# Altium PCB demo_dermis_main_testboard.PcbDoc (part 6 of 7)
Units mm, origin at the board's own origin, x right, y up, seen from the top; angles counter-clockwise.
Board outline 348.67 x 252.79 mm, 4 copper layers (Top Layer, Layer 1, Layer 2, Bottom Layer), stack 0.603 mm thick; 389 components, 231 nets, 2086 pads, 2626 vias.
Unrouted connection lines stored in the file: 34.
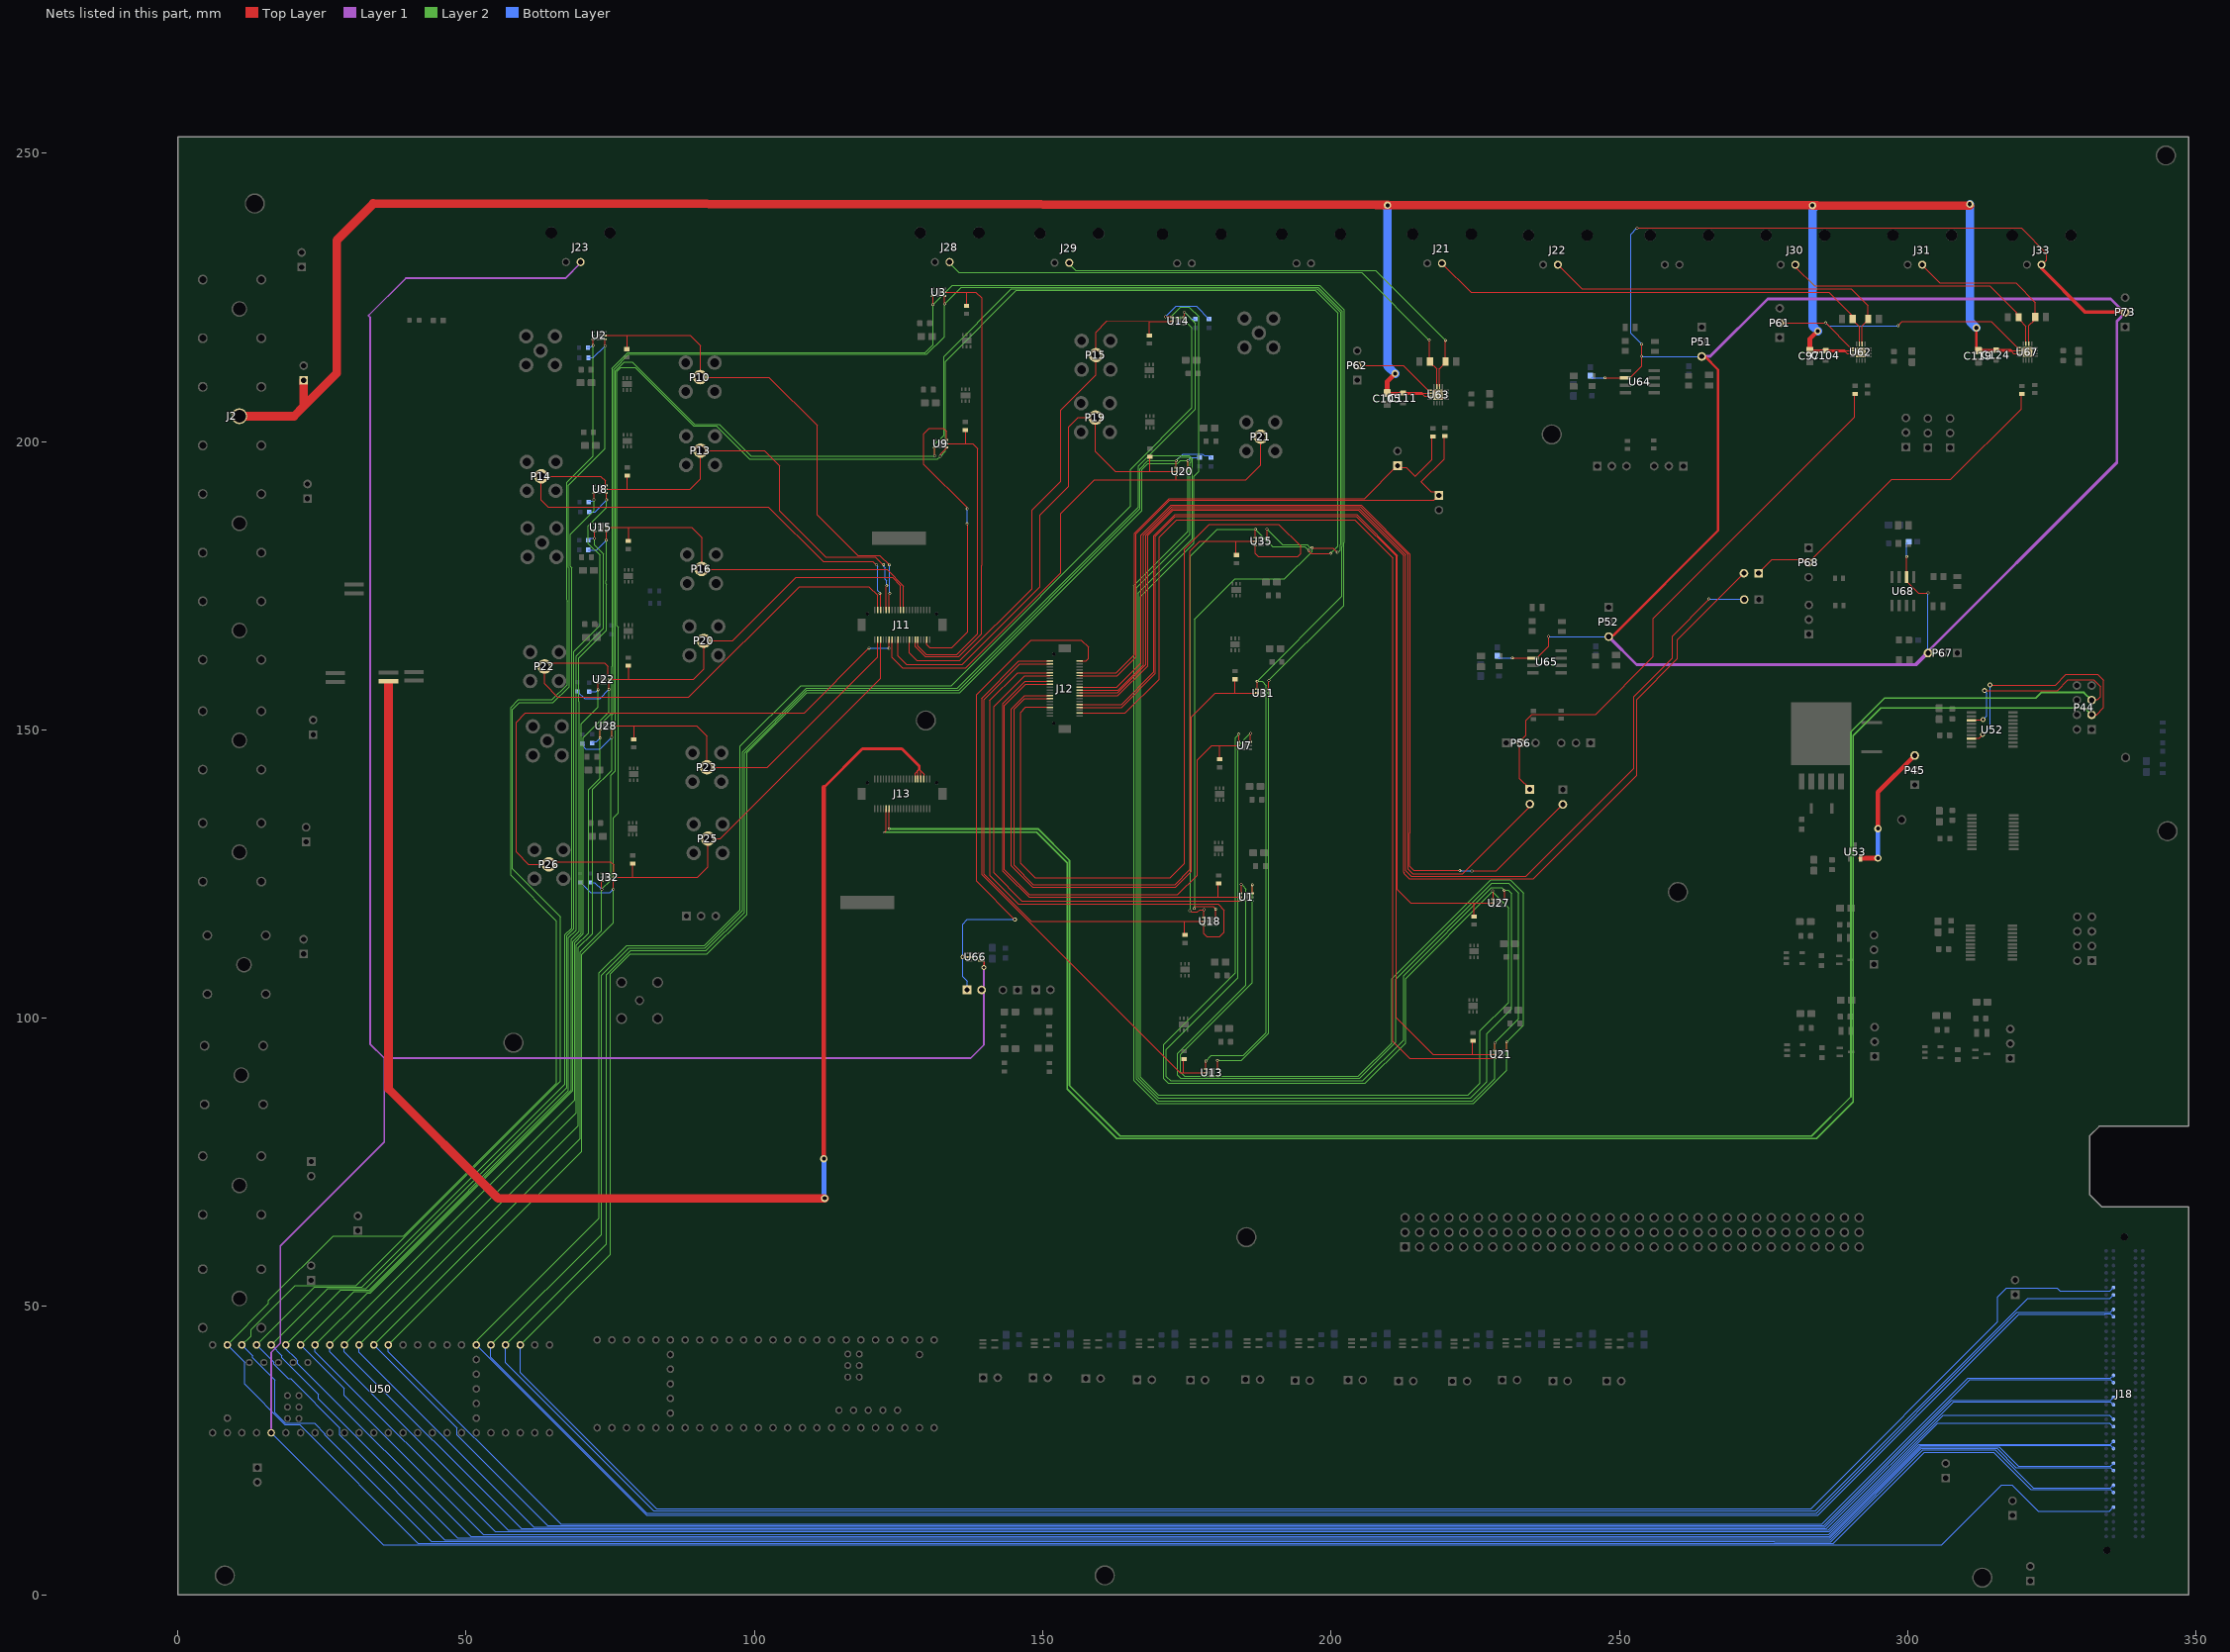
[diagram p7: the nets of this part, all layers, seen from the top]

## Via types
v1: diameter 0.4, hole 0.25, Top Layer to Bottom Layer, 1673 vias
v2: diameter 0.85, hole 0.5, Top Layer to Bottom Layer, 416 vias
v3: diameter 0.5, hole 0.3, Top Layer to Bottom Layer, 391 vias
v4: diameter 1.27, hole 0.711, Top Layer to Bottom Layer, 85 vias
v5: diameter 0.7, hole 0.4, Top Layer to Bottom Layer, 57 vias
v6: diameter 1.1, hole 0.7, Top Layer to Bottom Layer, 4 vias

## Nets (pads, with @x,y where several pads share a name; then routed paths per layer and width w, separated by ;. In a path a pad name is that pad's centre, name@x,y a point inside that pad or via, vN(x,y) a via of type N, cw(c..) or ccw(c..) an arc to the next point about the centre after c; other vN are vias at no path point) (continued)
VINP_X0: J11.28 P21.1 U20.3 | length 94.1
  Top Layer w0.15: J11.28@123.846,165.649 123.845,162.524 125.656,160.714 136.605,160.714 153.074,177.183 153.074,187.512 158.948,193.386 173.085,193.386 ; U20.3@173.094,194.174 173.085,194.165 173.085,193.386 ; P21.1@187.784,200.835 187.784,195.946 185.225,193.386 173.085,193.386
VINP_X0_0: P68.2 P70.1 R70.2 | length 60.2
  Top Layer w0.2: P70.1@274.118,177.192 276.466,179.541 P68.2@282.65,179.541 ; P68.2@282.778,179.004 297.188,193.413 307.453,193.413 319.672,205.633 319.672,208.209 319.787,208.323 R70.2@319.786,208.241
VINP_X0_2: J12.11 U1.3 | length 85.4
  Top Layer w0.15: J12.11@151.205,159.415 146.827,159.415 141.5,154.087 141.5,125.189 146.345,120.344 U1.3@184.077,120.344
VINP_X0_3: J12.38 U21.3 | length 187.6
  Top Layer w0.15: J12.38@156.865,152.937 164.297,152.937 170.15,158.791 170.15,183.402 173.197,186.448 204.099,186.448 210.733,179.814 210.733,95.939 213.605,93.067 U21.3@228.384,93.067
VINP_X1: J11.37 P22.1 U22.3 | length 86.1
  Top Layer w0.15: U22.3@74.849,159.38 74.696,159.38 74.594,159.483 74.594,161.006 74.014,161.586 64.213,161.586 P22.1@63.597,160.969 63.597,157.961 65.845,155.713 88.62,155.713 107.76,174.852 119.819,174.852 121.345,173.326 J11.37@121.346,170.799
VINP_Y0: J11.30 P26.1 U32.3 | length 113.7
  Top Layer w0.15: U32.3@75.593,125.093 75.593,126.559 75.058,127.095 64.755,127.095 P26.1@64.342,126.681 60.78,126.681 58.674,128.787 58.674,151.329 60.295,152.951 108.64,152.951 v3(119.855,164.165) ; v3(123.313,164.153) 123.313,165.617 J11.30@123.346,165.649
  Bottom Layer w0.15: v3(119.855,164.165) 119.861,164.159 123.307,164.159 v3(123.313,164.153)
VINP_Y0_0: P56.2 P58.1 R53.2 | length 99.7
  Top Layer w0.2: P58.1@234.388,139.856 232.696,141.547 232.696,148.039 233.744,149.087 233.744,151.628 234.828,152.712 245.852,152.712 255.842,162.702 255.842,169.33 290.777,204.264 290.777,208.15 R53.2@290.891,208.264
VINP_Y0_1: J11.4 U9.3 | length 52.6
  Top Layer w0.15: J11.4@129.846,165.649 129.857,165.638 129.857,164.774 130.347,164.284 134.191,164.284 136.955,167.048 v3@136.955,185.73 ; U9.3@133.308,200.268 133.308,201.734 132.772,202.27 130.292,202.27 129.383,201.361 129.383,196.036 v3@136.947,188.472
  Bottom Layer w0.15: v3@136.873,185.73 v3(136.873,188.33)
  other v3: 136.867,185.73
VINP_Y0_2: J12.9 U18.3 | length 95.2
  Top Layer w0.15: J12.9@151.205,159.914 145.643,159.914 140.768,155.04 140.768,124.783 145.763,119.788 180.363,119.788 181.428,118.723 181.428,114.923 180.663,114.157 178.457,114.157 177.921,114.693 U18.3@177.921,116.159
VINP_Y0_3: J12.33 U35.3 | length 151.4
  Top Layer w0.15: J12.33@151.491,153.931 147.043,153.931 146.147,153.035 146.147,126.885 148.649,124.383 172.079,124.383 174.472,126.776 174.472,181.218 178.896,185.642 190.904,185.642 194.716,181.829 194.716,180.551 194.216,180.051 187.334,180.051 186.819,180.566 U35.3@186.819,182.032
VINP_Y1: J11.35 P14.1 U8.3 | length 87.4
  Top Layer w0.15: U8.3@74.278,192.368 74.125,192.368 74.125,193.175 73.344,193.956 P14.1@63.025,193.956 63.025,189.813 63.038,189.813 63.968,188.883 64.173,188.679 102.436,188.679 111.885,179.231 120.528,179.231 v3@121.128,178.631 ; v3(121.723,173.691) 121.884,173.53 121.884,170.924 121.802,170.843 J11.35@121.846,170.799
  Bottom Layer w0.15: v3(121.125,178.627) 121.393,178.359 121.393,174.142 v3@121.784,173.752
VN_X0: J11.16 P15.1 R13.2 U14.2 | length 99.1
  Top Layer w0.15: J11.16@126.846,165.649 126.845,163.342 128.181,162.006 128.569,162.006 128.581,161.994 135.636,161.994 148.101,174.46 148.101,188.096 153.101,193.096 153.101,205.42 159.219,211.538 P15.1@159.219,214.965 ; P15.1@159.922,214.965 159.17,215.717 159.17,218.962 161.101,220.893 168.51,220.859 ; R13.2@168.453,218.391 168.51,218.447 168.51,220.859 ; 168.51,220.861 168.51,220.859 ; 168.612,220.841 U14.2@172.288,220.841 ; U14.2@172.612,220.841 172.449,220.841 168.51,220.859
VN_X0_2: J12.17 R9.2 U7.2 | length 105.2
  Top Layer w0.15: J12.17@151.252,157.912 147.029,157.912 143.312,154.195 143.312,125.759 147.659,121.411 173.404,121.411 176.808,124.815 176.808,144.81 179.266,147.269 180.641,147.269 ; R9.2@180.697,144.89 180.641,144.947 180.641,147.269 ; U7.2@183.958,147.269 180.641,147.269
VN_X0_3: J12.32 R19.2 U27.2 | length 163.4
  Top Layer w0.15: J12.32@156.355,154.414 163.665,154.414 169.273,160.022 169.273,183.69 172.898,187.315 204.439,187.315 211.512,180.241 211.512,122.266 213.784,119.994 224.741,119.994 ; R19.2@224.797,117.616 224.741,117.672 224.741,119.994 ; U27.2@228.058,119.994 224.741,119.994
VN_X1: J11.19 P16.1 R14.2 U15.2 | length 64.8
  Top Layer w0.15: U15.2@74.504,185.109 78.181,185.109 ; R14.2@78.125,182.73 78.181,182.787 78.181,185.109 ; P16.1@90.82,177.884 90.898,177.807 122.978,177.807 125.845,174.94 J11.19@125.845,170.799 ; P16.1@90.867,178.417 90.867,183.294 89.052,185.109 78.181,185.109
VN_Y0: J11.38 P23.1 R20.2 U28.2 | length 64.9
  Top Layer w0.15: U28.2@75.432,150.73 79.109,150.73 ; R20.2@79.052,148.351 79.109,148.408 79.109,150.73 ; P23.1@91.748,143.505 102.186,143.505 121.345,162.664 J11.38@121.346,165.649 ; P23.1@91.794,144.038 91.794,148.915 89.98,150.73 79.109,150.73
VN_Y0_1: J11.12 R8.2 U3.2 | length 82.9
  Top Layer w0.15: J11.12@127.846,165.649 127.845,164.408 129.572,162.681 135.4,162.681 139.365,166.647 139.365,178.549 139.365,224.917 138.378,225.905 136.823,225.905 ; U3.2@133.146,225.905 136.823,225.905 ; R8.2@137.136,223.271 136.88,223.526 R8.2@136.766,223.526 136.823,223.583 136.823,225.905
VN_Y0_2: J12.1 R12.2 U13.2 | length 100.4
  Top Layer w0.15: J12.1@151.205,161.914 145.843,161.914 139.389,155.461 139.389,124.937 170.451,93.874 173.804,90.522 174.406,90.522 ; R12.2@174.462,92.901 174.406,92.844 174.406,90.522 ; U13.2@178.082,90.522 174.406,90.522
VN_Y0_3: J12.25 R21.2 U31.2 | length 110.8
  Top Layer w0.15: J12.25@151.205,155.914 146.864,155.914 144.559,153.609 144.559,126.404 148.247,122.715 172.985,122.715 175.77,125.5 175.77,152.224 179.929,156.383 ; 179.929,156.395 183.304,156.395 ; R21.2@183.36,158.774 183.304,158.717 183.304,156.395 ; U31.2@186.98,156.395 183.304,156.395
VN_Y1: J11.29 P10.1 R7.2 U2.2 | length 87.7
  Top Layer w0.15: U2.2@74.255,218.387 77.932,218.387 ; R7.2@77.875,216.009 77.932,216.065 77.932,218.387 ; P10.1@90.572,211.162 102.494,211.162 110.867,202.789 110.867,187.297 117.912,180.251 121.739,180.251 v3(123.401,178.589) ; P10.1@90.618,211.695 90.618,216.572 88.803,218.387 77.932,218.387 ; J11.29@123.346,170.799 123.307,170.838 123.307,173.461 v3(123.473,173.627)
  Bottom Layer w0.15: v3(123.401,178.589) 123.443,178.548 123.443,173.657 v3(123.473,173.627)
VNEG: C97.2 C104.2 C105.2 C111.2 C119.2 C124.2 J2.1 P2.1 U62.14 U62.15 U62.17 U63.14 U63.15 U63.17 U67.14 U67.15 U67.17 | length 450.2
  Top Layer w0.2: C105.2@209.717,208.39 209.723,208.385 C105.2@209.754,208.353 ; U63.15@217.123,207.847 217.116,207.853 U63.15@217.109,207.853 216.183,207.853 215.683,208.353 U63.14@217.109,208.353 218.307,208.353 U63.17@218.557,208.103 ; C97.2@282.994,215.762 283,215.756 C97.2@283.031,215.725 ; U62.15@290.399,215.218 290.393,215.224 U62.15@290.386,215.224 289.46,215.224 288.959,215.725 U62.14@290.386,215.725 291.583,215.725 U62.17@291.834,215.474 ; U67.15@319.295,215.277 319.289,215.283 318.355,215.283 317.855,215.784 320.479,215.784 U67.17@320.729,215.533
  Top Layer w0.5: C105.2@209.724,208.387 209.723,208.385 209.71,208.353 C105.2@209.754,208.353 ; C105.2@210.039,208.353 215.683,208.353 ; C97.2@283.001,215.759 283,215.756 282.987,215.725 C97.2@283.031,215.725 ; C97.2@283.316,215.725 288.959,215.725 ; C119.2@311.882,215.784 v4(311.882,219.705) ; C119.2@312.793,215.784 317.855,215.784
  Top Layer w0.8: C105.2@209.717,208.39 209.717,210.403 v4(211.091,211.777) ; C97.2@282.994,215.762 282.994,217.775 v4(284.367,219.148)
  Top Layer w1.5: J2.1@10.67,204.398 20.125,204.398 21.918,206.192 ; P2.1@21.827,210.612 21.827,206.284 21.918,206.192 ; 33.631,240.96 27.571,234.9 27.571,211.844 21.918,206.192 ; 33.872,241.283 207.839,241.049 209.787,241.046 283.451,240.947 284.134,240.947 284.333,240.946 ; v4(283.451,240.914) v4@310.744,240.914
  Bottom Layer w1.5: v4@209.787,240.89 209.753,240.856 209.753,213.115 v4(211.091,211.777) ; 284.135,240.96 283.451,240.277 283.451,220.064 v4(284.367,219.148) ; v4(310.744,241.149) 310.744,220.843 v4(311.882,219.705)
  other v4: 209.787,240.959
VOCM_IN: C89.1 C90.1 C115.1 J33.2 P51.3 P52.3 P67.3 P73.2 U64.2@251.069,211.021 U65.2@234.952,162.437 U68.2@299.774,176.491 | length 452.2
  Top Layer w0.2: v3(231.389,162.458) 231.4,162.448 U65.2@234.792,162.448 ; U65.2@234.941,162.448 U65.2@234.952,162.437 235.663,162.437 237.708,164.482 v3@237.708,166.174 ; v3(247.506,211.042) 247.516,211.031 U64.2@250.909,211.031 ; U64.2@251.058,211.031 U64.2@251.069,211.021 251.78,211.021 253.824,213.066 v3(253.824,216.877) ; v3@253.141,236.996 319.646,236.996 324.077,232.565 324.077,231.421 J33.2@323.368,230.71 ; U68.2@299.784,176.501 U68.2@299.774,176.491 299.774,175.78 301.818,173.735 v3@303.51,173.735 ; U68.2@299.784,176.65 299.784,180.043 v3(299.795,180.053)
  Top Layer w0.4: P52.3@248.131,166.165 248.325,166.359 248.909,166.359 267.098,184.548 267.098,212.443 264.791,214.749 P51.3@264.248,214.749
  Top Layer w0.6: J33.2@323.185,230.003 330.774,222.414 P73.2@337.679,222.414
  Layer 1 w0.5: P52.3@248.131,166.165 252.984,161.312 301.197,161.312 ; P51.3@264.248,214.749 265.719,214.749 275.708,224.739 335.195,224.739 337.521,222.414 P73.2@337.679,222.414 337.679,222.308 336.252,220.881 336.252,196.367 301.197,161.312 ; P67.3@303.502,163.311 301.503,161.312 301.197,161.312
  Bottom Layer w0.2: C90.1@228.994,162.632 229.15,162.476 v3@231.389,162.476 ; v3(237.681,166.182) 237.69,166.174 248.123,166.174 P52.3@248.131,166.165 ; C89.1@245.111,211.215 245.267,211.06 v3@247.506,211.06 ; v3(253.031,236.996) 251.942,235.907 251.942,218.76 v3(253.824,216.877) ; v3(253.798,214.766) 253.807,214.758 264.24,214.758 P51.3@264.248,214.749 ; v3@299.812,180.053 299.812,182.293 C115.1@299.968,182.449 ; P67.3@303.502,163.311 303.51,163.32 303.51,173.753 v3(303.519,173.761)
VOCM_SEL: P61.2 U62.13 U67.13 | length 50.3
  Top Layer w0.2: P61.2@277.78,220.565 285.766,220.565 290.106,216.225 U62.13@290.386,216.225 ; v3(298.317,220.08) 299.04,220.804 314.481,220.804 319.002,216.284 U67.13@319.281,216.284
  Bottom Layer w0.2: v3(285.767,220.578) 286.263,220.08 v3(298.317,220.08)
VOCM_SEL2: P62.2 U63.13 | length 14.4
  Top Layer w0.2: P62.2@204.503,213.194 212.489,213.194 216.83,208.853 U63.13@217.109,208.853
VOUT_COMP: J12.2 P53.1 U66.2@137.236,110.617 | length 92.6
  Top Layer w0.15: v5@136.105,110.627 137.225,110.627 U66.2@137.236,110.617 ; P53.1@136.596,105.419 136.975,105.04 P53.1@137.271,104.744 ; v5@145.124,117.083 138.49,123.716 138.49,156.134 147.934,165.578 156.674,165.578 157.895,164.356 157.895,162.347 157.462,161.914 J12.2@156.355,161.914
  Bottom Layer w0.15: v5(136.081,110.623) 136.081,107.213 136.911,106.382 136.911,104.977 P53.1@136.837,104.903 ; v5@136.105,110.627 136.105,116.328 136.884,117.107 v5(145.149,117.107)
VOUT_COMP_EXT: J18.G36 J23.2 P53.2 U50.22 U66.4@139.318,109.967 | length 697.4
  Top Layer w0.25: v2(139.777,108.798) U66.4@139.777,109.967 ; P53.2@139.811,104.744 P53.2@139.811,104.903
  Layer 1 w0.3: U50.22@16.19,28.109 16.19,42.07 17.767,43.647 17.767,60.518 35.779,78.53 35.779,93.084 ; J23.2@69.913,231.044 67.18,228.311 39.527,228.311 33.105,221.888 33.105,221.806 33.332,221.578 33.332,95.53 35.779,93.084 ; v2(139.777,108.798) 139.777,95.357 137.504,93.084 35.779,93.084
  Bottom Layer w0.15: U50.22@16.19,28.109 35.594,8.705 305.891,8.705 316.278,19.092 318.046,19.092 322.609,14.529 334.931,14.529 335.666,15.264 J18.G36@335.666,15.206
VOUTN_OTA: J12.10 P63.1 R57.2 | length 93.7
  Top Layer w0.15: J12.10@156.355,159.914 162.727,159.914 165.871,163.058 165.871,184.124 171.88,190.133 205.828,190.133 P63.1@211.499,195.804
  Top Layer w0.2: P63.1@212.105,195.536 212.983,195.536 214.563,193.956 217.5,196.893 217.5,200.778 R57.2@217.614,200.893
VOUTN_OTA_INAMP: C107.2 J29.2 U63.10 | length 79.8
  Top Layer w0.2: U63.10@218.807,209.551 218.807,212.664 218.815,212.664 C107.2@219.83,213.679 ; C107.2@219.83,213.869 v3@219.83,217.543
  Layer 2 w0.1: J29.2@153.998,231.331 154.455,230.873 155.678,229.65 207.707,229.65 v3(219.815,217.543)
VOUTN_X0: J12.24 P71.2 | length 229.7
  Top Layer w0.15: J12.24@156.355,156.414 162.972,156.414 167.863,161.306 167.863,183.784 172.496,188.416 204.87,188.416 212.951,180.334 212.951,125.58 213.878,124.654 233.795,124.654 252.472,143.331 252.472,155.766 259.154,162.447 259.154,166.264 v3@265.559,172.669
  Bottom Layer w0.1: v3(265.523,172.696) 265.578,172.642 271.555,172.642 P71.2@271.61,172.587
VOUTN_X0_INAMP: C118.1 J30.2 U67.11 | length 47.2
  Top Layer w0.2: J30.2@280.483,230.272 283.779,226.977 314.196,226.977 318.82,222.352 318.82,221.929 C118.1@319.204,221.545 ; C118.1@319.314,221.133 320.479,219.968 U67.11@320.479,216.981
VOUTN_Y0: J12.20 P59.2 | length 172.7
  Top Layer w0.15: J12.20@156.355,157.414 162.78,157.414 167.007,161.641 167.007,183.728 172.253,188.974 205.175,188.974 213.641,180.508 213.641,132.067 213.641,126.296 214.312,125.626 v3@222.358,125.626 ; v3(224.373,125.527) 224.424,125.578 228.666,125.578 P59.2@240.167,137.08
  Bottom Layer w0.15: v3(222.305,125.578) v3@224.373,125.578
VOUTN_Y0_INAMP: C95.1 J21.2 U62.11 | length 80.6
  Top Layer w0.2: J21.2@219.207,231.369 219.207,230.901 224.219,225.889 286.32,225.889 290.419,221.79 C95.1@290.419,221.265 ; C95.1@290.419,221.074 291.583,219.909 U62.11@291.583,216.922
VOUTP_OTA: J12.12 P60.1 R58.2 | length 101.5
  Top Layer w0.1: 217.862,189.83 P60.1@218.681,190.648
  Top Layer w0.15: J12.12@156.355,159.415 162.923,159.415 166.136,162.628 166.136,183.997 171.969,189.83 217.862,189.83
  Top Layer w0.2: P60.1@218.681,190.648 218.031,191.298 217.281,191.298 215.605,192.974 219.597,196.965 219.597,200.851 R58.2@219.711,200.965
VOUTP_OTA_INAMP: C96.1 J28.2 U63.11 | length 97.7
  Top Layer w0.2: C96.1@217.01,213.898 v3@217.01,217.571 ; C96.1@217.142,213.703 218.307,212.538 U63.11@218.307,209.551 ; C96.1@217.142,213.893 C96.1@217.142,214.419
  Layer 2 w0.1: J28.2@133.818,231.115 133.818,230.916 135.424,229.31 205.254,229.31 v3(216.994,217.571)
VOUTP_X0: J12.26 P70.2 | length 232.2
  Top Layer w0.15: J12.26@156.355,155.914 163.016,155.914 168.214,161.112 168.214,183.732 172.612,188.13 204.727,188.13 212.617,180.24 212.617,125.296 212.701,125.211 212.701,125.006 213.501,124.206 235.069,124.206 252.998,142.135 252.998,155.283 260.074,162.359 260.074,165.659 P70.2@271.573,177.158
VOUTP_X0_INAMP: C122.2 J31.2 U67.10 | length 29.5
  Top Layer w0.2: J31.2@302.5,230.671 302.5,230.482 305.51,227.472 318.723,227.472 322.101,224.094 C122.2@322.101,221.575 ; U67.10@320.979,216.981 320.979,220.094 320.987,220.094 C122.2@322.002,221.109
VOUTP_Y0: J12.22 P58.2 | length 167.5
  Top Layer w0.15: J12.22@156.355,156.914 163.095,156.914 167.409,161.228 167.409,183.716 172.417,188.724 204.994,188.724 213.266,180.452 213.266,125.932 214.153,125.046 222.767,125.046 P58.2@234.366,136.644
VOUTP_Y0_INAMP: C102.2 J22.2 U62.10 | length 63.8
  Top Layer w0.2: J22.2@239.198,230.777 243.509,226.467 290.183,226.467 293.107,223.542 C102.2@293.107,221.241 ; U62.10@292.084,216.922 292.084,220.035 292.092,220.035 C102.2@293.107,221.05
VP_X0: J11.24 P19.1 R16.2 U20.2 | length 92.4
  Top Layer w0.15: J11.24@124.846,165.649 124.845,162.823 126.324,161.345 136.076,161.345 149.529,174.798 149.529,187.223 154.529,192.223 154.529,202.573 156.091,204.135 P19.1@159.129,204.135 159.129,198.241 162.546,194.824 U20.2@173.094,194.824 ; 168.543,194.841 R16.2@168.543,197.22
VP_X0_2: J12.15 R6.2 U1.2 | length 84.2
  Top Layer w0.15: J12.15@151.311,158.412 146.933,158.412 143.062,154.54 143.062,125.508 143.683,124.888 147.589,120.982 180.443,120.982 ; R6.2@180.5,123.36 180.443,123.304 180.443,120.982 ; U1.2@184.12,120.982 180.443,120.982
VP_X0_3: J12.34 R17.2 U21.2 | length 187.4
  Top Layer w0.15: J12.34@156.355,153.915 163.67,153.915 169.523,159.768 169.523,183.586 172.969,187.032 204.329,187.032 211.262,180.099 211.262,100.112 217.667,93.707 224.543,93.707 ; R17.2@224.6,96.086 224.543,96.029 224.543,93.707 ; U21.2@228.22,93.707 224.543,93.707
VP_X1: J11.21 P20.1 R18.2 U22.2 | length 67.9
  Top Layer w0.15: U22.2@74.849,158.73 78.166,158.73 ; R18.2@78.11,161.109 78.166,161.053 78.166,158.73 ; J11.21@125.346,170.799 125.345,175.016 123.938,176.423 107.216,176.423 96.216,165.423 P20.1@91.211,165.423 91.211,160.545 89.396,158.73 78.166,158.73
VP_Y0: J11.36 P25.1 R22.2 U32.2 | length 72.5
  Top Layer w0.15: U32.2@75.593,124.443 78.911,124.443 ; R22.2@78.855,126.821 78.911,126.765 78.911,124.443 ; J11.36@121.846,165.649 121.845,158.939 94.042,131.136 P25.1@91.956,131.136 91.956,126.258 90.141,124.443 78.911,124.443
VP_Y0_1: J11.10 R11.2 U9.2 | length 53.9
  Top Layer w0.15: J11.10@128.346,165.649 128.345,164.486 129.8,163.031 135.13,163.031 138.727,166.628 138.727,198.731 137.841,199.618 136.625,199.618 ; U9.2@133.308,199.618 136.625,199.618 ; R11.2@136.569,201.996 136.625,201.94 136.625,199.618
VP_Y0_2: J12.3 R15.2 U18.2 | length 88.1
  Top Layer w0.15: J12.3@151.205,161.415 145.979,161.415 139.842,155.278 139.842,124.921 147.954,116.809 174.603,116.809 ; R15.2@174.66,114.431 174.603,114.487 174.603,116.809 ; U18.2@177.921,116.809 174.603,116.809
VP_Y0_3: J12.27 R23.2 U35.2 | length 136.6
  Top Layer w0.15: J12.27@151.205,155.414 146.839,155.414 145.018,153.594 145.018,126.466 148.324,123.16 172.895,123.16 175.52,125.785 175.52,180.967 177.236,182.682 183.501,182.682 ; R23.2@183.558,180.304 183.501,180.36 183.501,182.682 ; U35.2@186.819,182.682 183.501,182.682
VP_Y1: J11.31 P13.1 R10.2 U8.2 | length 76.9
  Top Layer w0.15: U8.2@74.278,191.718 77.954,191.718 ; R10.2@77.897,194.096 77.954,194.04 77.954,191.718 ; v3@122.227,178.677 120.953,179.951 112.34,179.951 104.375,187.916 104.375,195.718 101.683,198.411 P13.1@90.64,198.411 90.64,193.533 88.825,191.718 77.954,191.718 ; J11.31@122.845,170.799 122.832,170.813 122.832,174.829 122.918,174.915 v3(122.918,175.01)
  Bottom Layer w0.15: v3(122.386,178.669) 122.386,178.377 122.622,178.14 122.622,176.124 122.841,175.905 122.918,175.828 v3(122.918,175.01)
VREF_2P5V: P45.3 U53.2 | length 23.5
  Top Layer w0.8: U53.2@291.788,127.755 v4(294.813,127.755) ; v4(294.813,132.87) 294.813,139.169 P45.3@301.195,145.55
  Bottom Layer w0.8: v4(294.813,127.755) v4(294.813,132.87)
VSS: J13.5 J13.7 J13.9 J13.11 R2.2 | length 253.4
  Top Layer w0.15: J13.5@129.345,141.48 J13.5@129.395,141.53
  Top Layer w0.2: J13.11@127.845,141.48 127.845,142.475 128.567,143.197 ; J13.9@128.345,141.48 128.345,142.895 128.499,143.048 ; 128.645,143.072 128.845,142.871 J13.7@128.845,141.48 ; 128.895,142.821 129.395,142.321 J13.5@129.395,141.53
  Top Layer w0.5: 112.028,140.026 118.714,146.713 125.549,146.713 128.567,143.695 128.567,143.197
  Top Layer w0.8: v4(112.028,75.636) 112.028,140.026 112.028,140.066
  Top Layer w1.5: 36.485,87.795 36.533,87.746 ; 36.533,157.875 36.533,87.746 ; v4(112.173,68.761) 55.518,68.761 36.533,87.746
  Bottom Layer w0.5: v4@111.993,75.602 v4(112.028,75.636)
  Bottom Layer w0.8: v4@112.045,68.592 v4@112.045,75.856
VTRIG_COMP: J13.30 P44.5 U52.3 | length 358.5
  Top Layer w0.15: U52.3@311.302,151.759 v2(313.03,151.759)
  Top Layer w0.2: J13.30@123.314,136.33 J13.30@123.345,136.33 ; v1(123.325,132.828) 123.335,132.838 123.335,136.158 J13.30@123.325,136.168 ; v2(313.304,156.802) 325.949,156.802 327.792,158.645 332.249,158.645 333.446,157.448 333.446,155.8 332.906,155.26 331.961,155.26 P44.5@331.856,155.155
  Layer 2 w0.3: v1(123.325,132.828) 149.154,132.828 154.625,127.357 154.625,88.33 163.408,79.547 283.274,79.547 290.119,86.391 290.119,149.657 295.963,155.502 322.154,155.502 323.139,156.486 330.524,156.486 P44.5@331.856,155.155
  Bottom Layer w0.15: v2(313.304,156.802) 313.716,156.39
  Bottom Layer w0.2: v2(313.03,151.759) 313.716,152.445 313.716,156.39
VTUNE_PSEUDO: J13.32 P44.3 U52.8 | length 366.4
  Top Layer w0.15: 122.822,132.495 J13.32@122.822,136.33
  Top Layer w0.2: v1(122.525,132.198) 122.822,132.495 ; J13.32@122.826,136.226 122.836,136.235 J13.32@122.845,136.33 ; U52.8@311.356,148.563 312.364,148.563 v2(312.985,149.183) ; v2(314.263,157.762) 325.574,157.762 327.406,159.593 332.925,159.593 333.96,158.559 333.96,153.841 332.734,152.615 P44.3@331.856,152.615
  Layer 2 w0.3: v1(122.525,132.198) 139.169,132.239 148.925,132.239 154.225,126.939 154.225,87.746 162.824,79.147 284.159,79.147 290.519,85.507 290.519,133.412 290.519,148.98 295.339,153.8 330.671,153.8 P44.3@331.856,152.615
  Bottom Layer w0.2: v2(312.985,149.183) 314.263,150.461 v2(314.263,157.762)
X0_CSN_SCL: J18.G09 R40.2 U7.6 U14.6 U27.6 U50.28 | length 932.1
  Top Layer w0.15: U14.6@174.506,221.55 174.547,221.59 v3(174.547,222.426) ; U7.6@186.013,147.989 v3(186.013,149.387) ; U7.6@186.016,147.919 U7.6@186.055,147.958 ; U27.6@230.113,120.714 v3@230.113,122.113 ; U27.6@230.116,120.644 U27.6@230.155,120.684
  Layer 2 w0.15: U50.28@54.29,43.349 73.45,62.509 73.45,107.478 78.182,112.21 91.451,112.21 97.953,118.711 97.953,146.141 108.997,157.185 135.135,157.185 166.616,188.665 166.616,195.734 168.432,197.551 ; v3(174.547,222.426) 176.496,220.476 176.496,205.615 168.432,197.551 ; v3(186.013,149.387) 183.803,147.178 183.803,107.001 171.395,94.593 171.395,89.863 172.126,89.132 205.485,89.132 212.544,96.191 212.544,107.397 227.753,122.606 229.598,122.606 v3(230,122.204) 230.683,122.204 231.311,121.576 231.311,101.616 226.984,97.288 226.984,89.02 224.161,86.197 169.995,86.197 166.526,89.666 166.526,173.697 175.934,183.105 175.934,196.998 175.382,197.551 168.432,197.551
  Bottom Layer w0.15: U50.28@54.29,43.349 54.29,41.24 81.325,14.205 284.162,14.205 318.958,49.001 335.17,49.001 J18.G09@335.666,49.496 ; v3(174.547,222.426) 175.744,221.228 R40.2@176.478,221.228
X0_CSN_SDA: J18.G10 R39.2 U7.1 U14.1 U27.1 U50.27 | length 963.3
  Top Layer w0.15: v3(171.262,221.652) 172.346,221.652 U14.1@172.449,221.55 ; U7.1@183.958,147.919 U7.1@184.033,147.994 ; U7.1@183.991,148.024 v3@183.991,149.387 ; U27.1@228.058,120.644 U27.1@228.133,120.719 ; U27.1@228.091,120.749 v3@228.091,122.113
  Layer 2 w0.15: U50.27@51.75,43.349 51.92,43.519 51.92,44.228 73.032,65.339 73.032,107.857 77.807,112.632 91.317,112.632 97.5,118.815 97.5,147.155 108.04,157.695 134.134,157.695 165.242,188.803 165.242,195.192 175.896,205.846 175.896,219.742 174.104,221.533 172.174,221.533 172.154,221.554 ; v3(171.262,221.652) 172.055,221.652 172.154,221.554 ; v3(183.983,149.264) 183.398,148.679 183.398,107.861 170.965,95.429 170.965,89.53 171.771,88.724 205.881,88.724 212.894,95.736 212.894,106.869 v3@227.97,121.945 ; v3(227.97,122.081) v3@227.97,121.945 ; 172.154,221.554 173.922,223.322 175.38,223.322 177.031,221.671 177.031,194.803 176.222,193.994 176.222,182.374 166.924,173.077 166.924,89.805 170.058,86.67 223.772,86.67 225.821,88.719 225.821,97.805 230.77,102.754 230.77,119.145 v3@227.97,121.945
  Bottom Layer w0.15: U50.27@51.75,43.349 81.278,13.82 284.382,13.82 319.257,48.696 334.165,48.696 334.19,48.721 335.171,48.721 J18.G10@335.666,48.226 ; v3(171.262,221.652) 171.319,221.652 173.108,223.441 176.605,223.441 178.807,221.238 R39.2@178.83,221.238
X0_CSP_SCL: J18.G06 R42.2 U1.6 U20.6 U21.6 U50.30 | length 875.8
  Top Layer w0.15: U20.6@175.151,195.474 175.177,195.5 175.159,195.517 v3(175.159,196.677) ; v3(186.333,123.144) 186.333,121.65 U1.6@186.341,121.642 ; v3(230.433,95.87) 230.433,94.376 U21.6@230.442,94.367
  Layer 2 w0.15: U50.30@59.37,43.349 75.042,59.021 75.042,107.737 78.409,111.103 91.779,111.103 98.693,118.017 98.693,146.032 109.091,156.43 135.606,156.43 167.225,188.05 167.225,195.164 168.216,196.155 173.334,196.155 173.857,196.677 v3(175.159,196.677) 175.159,184.442 165.724,175.007 165.724,89.294 169.784,85.234 224.714,85.234 230.433,90.954 v3(230.433,95.87) 233.389,98.826 233.389,121.665 231.012,124.041 227.703,124.041 210.513,106.851 210.513,95.732 204.691,89.91 174.544,89.91 173.852,90.603 173.852,93.702 186.314,106.164 v3@186.314,123.144
  Bottom Layer w0.15: U50.30@59.37,43.349 59.37,38.53 82.968,14.933 283.186,14.933 315.599,47.346 315.599,51.682 317.148,53.231 325.855,53.231 326.369,52.716 335.076,52.716 J18.G06@335.666,53.306 ; v3(175.159,196.677) 175.719,197.237 R42.2@177.175,197.237
X0_CSP_SDA: J18.G07 R41.2 U1.1 U20.1 U21.1 U50.29 | length 878.8
  Top Layer w0.15: U20.1@173.094,195.474 173.117,195.497 v3(173.117,196.68) ; U1.1@184.284,121.642 184.396,121.754 v3(184.396,123.188) ; U21.1@228.384,94.367 228.403,94.386 v3(228.403,95.747)
  Layer 2 w0.15: U50.29@56.83,43.349 74.334,60.852 74.334,107.54 78.512,111.719 91.598,111.719 98.253,118.373 98.253,146.016 109.121,156.885 135.401,156.885 166.866,188.35 166.866,195.285 168.26,196.68 v3(173.117,196.68) 173.152,196.68 173.773,197.301 175.278,197.301 175.684,196.895 175.684,196.46 175.488,196.264 175.488,183.899 166.136,174.547 166.136,89.485 169.98,85.641 224.507,85.641 228.395,89.53 228.395,95.739 v3(228.403,95.747) 232.516,99.86 232.516,121.728 230.822,123.422 227.867,123.422 211.25,106.805 211.25,95.871 204.965,89.585 173.883,89.585 173.354,90.115 173.354,93.854 185.231,105.73 185.231,122.405 184.601,123.036
  Bottom Layer w0.15: U50.29@56.83,43.349 56.83,40.236 82.497,14.57 283.972,14.57 320.821,51.419 335.049,51.419 J18.G07@335.666,52.036 ; v3(173.117,196.68) 174.277,197.84 177.668,197.84 177.967,197.542 178.864,197.542 R41.2@179.167,197.239
X1_CSN_SCL: J18.G28 R30.2 U15.6 U50.4 | length 507
  Top Layer w0.15: v3(72.238,183.193) 72.238,184.404 U15.6@72.283,184.449
  Layer 2 w0.15: U50.4@18.73,43.349 28.268,52.886 33.21,52.886 67.743,87.419 67.743,113.963 69.062,115.282 69.062,162.828 73.811,167.578 73.811,180.469 72.238,182.043 v3(72.238,183.193)
  Bottom Layer w0.15: U50.4@18.73,43.349 18.73,42.693 20.32,41.103 20.333,41.103 20.804,40.632 20.804,40.102 50.79,10.116 286.403,10.116 302.173,25.887 335.144,25.887 335.729,25.302 J18.G28@335.8,25.302 ; R30.2@71.183,182.916 71.461,183.193 v3(72.238,183.193)
X1_CSN_SDA: J18.G27 R29.2 U15.1 U50.5 | length 504
  Top Layer w0.15: v3(74.31,182.884) 74.31,184.419 U15.1@74.34,184.449
  Layer 2 w0.15: U50.5@21.27,43.349 30.558,52.636 33.314,52.636 68.213,87.535 68.213,113.676 69.565,115.029 69.565,154.942 69.565,162.487 74.31,167.232 74.31,175.279 74.215,175.375 74.215,175.809 74.31,175.905 v3(74.31,182.884)
  Bottom Layer w0.15: U50.5@21.27,43.349 28.829,35.789 28.829,34.617 52.94,10.506 286.286,10.506 301.917,26.137 335.167,26.137 335.65,26.62 J18.G27@335.735,26.62 ; R29.2@71.17,181.205 72.632,181.205 v3(74.31,182.884)
X1_CSP_SCL: J18.G25 R32.2 U22.6 U50.6 | length 471.1
  Top Layer w0.15: U22.6@72.791,158.081 72.798,158.081 72.875,158.003 v3(72.875,156.959)
  Layer 2 w0.15: U50.6@23.81,43.349 32.848,52.386 33.417,52.386 68.513,87.481 68.513,113.277 69.943,114.707 69.943,151.075 72.875,154.007 v3(72.875,156.959)
  Bottom Layer w0.15: U50.6@23.81,43.349 23.81,42.176 54.994,10.992 286.419,10.992 305.223,29.796 334.967,29.796 J18.G25@335.65,29.113 ; R32.2@71.319,156.623 72.539,156.623 v3(72.875,156.959)
X1_CSP_SDA: J18.G24 R31.2 U22.1 U50.7 | length 473.3
  Top Layer w0.15: v3(74.765,157.02) 74.765,158.003 74.842,158.081 U22.1@74.849,158.081
  Layer 2 w0.15: U50.7@26.35,43.349 68.813,85.811 68.813,113.152 70.294,114.634 70.294,148.668 74.765,153.138 v3(74.765,157.02)
  Bottom Layer w0.15: U50.7@26.35,43.349 26.35,42.124 57.231,11.242 286.202,11.242 306.089,31.129 334.982,31.129 J18.G24@335.666,30.446 ; R31.2@69.264,156.669 69.286,156.669 70.517,155.437 73.181,155.437 v3(74.765,157.02)
Y0_CSN_SCL: J18.G22 R36.2 U3.6 U13.6 U28.6 U31.6 U50.8 | length 806.7
  Top Layer w0.15: U28.6@73.21,150.07 73.219,150.061 v3(73.219,148.568) ; U3.6@130.924,225.245 130.933,225.236 v3(130.933,223.742) ; v3(180.295,92.685) 180.295,91.191 U13.6@180.304,91.182 ; v3(189.193,158.558) 189.193,157.064 U31.6@189.202,157.055
  Layer 2 w0.15: U50.8@28.89,43.349 69.113,83.571 69.113,112.655 71.209,114.752 71.209,139.623 73.219,141.633 v3(73.219,148.568) 73.219,150.879 75.294,152.955 75.294,160.992 75.294,212.634 78.037,215.377 129.485,215.377 ; 129.494,215.368 130.933,216.807 v3(130.933,223.742) 130.962,223.742 134.307,227.088 198.015,227.088 202.221,222.881 ; v3(180.295,92.685) 180.302,92.677 184.446,92.677 189.193,97.425 v3(189.193,158.558) 202.203,171.568 202.203,182.464 202.203,222.863
  Bottom Layer w0.15: U50.8@28.89,43.349 28.89,42.166 59.564,11.492 285.91,11.492 307.898,33.481 335.17,33.481 J18.G22@335.666,32.986 ; R36.2@71.847,147.668 72.15,147.971 72.622,147.971 v3(73.219,148.568)
Y0_CSN_SDA: J18.G21 R35.2 U3.1 U13.1 U28.1 U31.1 U50.9 | length 809.1
  Top Layer w0.15: v3(75.249,148.691) 75.249,150.051 U28.1@75.268,150.07 ; v3(132.963,223.865) 132.963,225.225 U3.1@132.982,225.245 ; U13.1@178.247,91.182 178.266,91.201 v3(178.266,92.562) ; U31.1@187.144,157.055 187.164,157.075 v3(187.164,158.435)
  Layer 2 w0.15: U50.9@31.43,43.349 69.477,81.395 69.477,112.241 71.938,114.702 71.938,139.712 75.249,143.023 v3(75.249,148.691) 75.249,152.555 75.595,152.901 75.595,212.485 78.227,215.118 129.883,215.118 132.963,218.197 v3(132.963,223.865) 135.865,226.767 197.721,226.767 201.896,222.592 ; v3(178.266,92.562) 179.217,93.512 184.746,93.512 188.763,97.53 188.763,157.679 188.007,158.435 v3(187.164,158.435) 201.889,173.161 201.889,181.799 201.889,222.585
  Bottom Layer w0.15: U50.9@31.43,43.349 31.43,42.041 61.692,11.78 285.646,11.78 307.597,33.731 335.141,33.731 J18.G21@335.666,34.256 ; R35.2@70.132,147.644 70.154,147.644 70.457,147.341 70.457,146.97 70.747,146.68 73.238,146.68 v3(75.249,148.691)
Y0_CSP_SCL: J18.G19 R38.2 U9.6 U18.6 U32.6 U35.6 U50.10 | length 812.3
  Top Layer w0.1: v3@196.627,181.555 200.284,181.555 v3(201.074,180.765)
  Top Layer w0.15: v3(73.497,122.355) 73.497,123.753 U32.6@73.536,123.793 ; U9.6@131.211,198.928 U9.6@131.25,198.968 ; v3(131.253,197.499) U9.6@131.253,198.898 ; v3@176.265,119.176 176.432,119.343 179.528,119.343 179.93,118.941 v3(179.977,118.941) ; U18.6@179.975,117.529 v3@179.975,118.928 ; U18.6@179.978,117.459 U18.6@180.018,117.499 ; U35.6@188.873,183.402 v3(188.873,184.801) ; U35.6@188.876,183.332 U35.6@188.916,183.372
  Layer 2 w0.15: U50.10@33.97,43.349 69.777,79.155 69.777,111.489 73.497,115.209 v3(73.497,122.355) 75.088,123.946 75.088,142.126 75.867,142.906 75.867,212.241 77.43,213.805 78.756,213.805 89.597,202.963 93.928,202.963 99.393,197.499 v3(131.253,197.499) 131.253,199.507 132.842,201.096 132.842,214.739 144.549,226.446 197.559,226.446 201.565,222.44 201.565,182.113 201.565,181.201 v3@201.069,180.705 ; v3@176.272,119.058 176.272,169.156 183.305,176.19 185.084,176.19 185.109,176.165 191.931,176.165 196.689,180.923 v3(196.689,181.601) 196.681,181.609 196.299,181.609 195.836,182.072 191.602,182.072 v3(188.873,184.801)
  Bottom Layer w0.15: U50.10@33.97,43.349 48.381,28.938 48.381,27.765 64.117,12.03 285.462,12.03 310.736,37.303 335.158,37.303 J18.G19@335.666,36.796 ; R38.2@71.597,123.54 72.311,123.54 v3(73.497,122.355)
  other v3: 176.26,119.041
Y0_CSP_SDA: J18.G18 R37.2 U9.1 U18.1 U32.1 U35.1 U50.11 | length 811
  Top Layer w0.1: v3@196.129,181.002 196.548,180.584 v3(199.894,180.584)
  Top Layer w0.15: v3(75.519,122.355) 75.519,123.718 U32.1@75.593,123.793 ; v3(132.218,197.414) 132.218,197.805 U9.1@133.275,198.862 ; U9.1@133.233,198.893 U9.1@133.308,198.968 ; v3@175.516,118.651 175.749,118.419 176.827,118.419 177.226,118.818 v3(177.947,118.818) ; U18.1@177.921,117.459 U18.1@177.996,117.534 ; U18.1@177.953,117.564 v3@177.953,118.928 ; U35.1@186.819,183.332 U35.1@186.894,183.407 ; U35.1@186.851,183.438 v3(186.851,184.801)
  Layer 2 w0.15: U50.11@36.51,43.349 70.077,76.915 70.077,111.067 75.519,116.509 v3(75.519,122.355) 75.519,134.762 76.363,135.607 76.363,167.768 76.117,168.014 76.117,212.138 76.786,212.806 79.347,212.806 89.44,202.713 93.352,202.713 99.092,196.974 131.778,196.974 v3(132.218,197.414) 133.122,198.318 133.122,213.909 145.407,226.194 197.254,226.194 201.134,222.314 201.134,181.823 v3(199.894,180.584) ; v3@175.509,118.659 175.509,180.094 180.217,184.801 v3(186.851,184.801) 189.851,181.801 195.414,181.801 v3(196.106,181.109)
  Bottom Layer w0.15: U50.11@36.51,43.349 36.51,42.176 66.407,12.28 285.105,12.28 310.379,37.553 335.153,37.553 J18.G18@335.666,38.066 ; R37.2@69.806,123.535 69.829,123.535 71.583,121.78 74.944,121.78 v3(75.519,122.355)
  other v3: 175.478,118.65
Y1_CSN_SCL: J18.G34 R25.2 U2.6 U50.0 | length 572.1
  Top Layer w0.15: v3(72.009,216.64) 72.009,217.702 U2.6@72.034,217.727
  Layer 2 w0.15: U50.0@8.57,43.349 15.756,50.534 15.756,51.062 26.938,62.244 39.144,62.244 65.6,88.7 65.6,116.924 57.743,124.781 57.743,153.883 59.08,155.22 64.933,155.22 67.571,157.858 67.571,172.331 67.439,172.464 67.439,192.937 72.009,197.507 v3(72.009,216.64)
  Bottom Layer w0.15: U50.0@8.57,43.349 11.576,40.343 11.576,36.527 18.574,29.53 21.101,29.53 41.675,8.955 287.071,8.955 302.866,24.75 314.882,24.75 321.361,18.271 335.141,18.271 335.762,17.649 J18.G34@335.762,17.643 ; R25.2@70.995,216.362 71.61,216.362 v3@71.948,216.7
Y1_CSN_SDA: J18.G33 R24.2 U2.1 U50.1 | length 572.9
  Top Layer w0.15: U2.1@74.091,217.727 74.096,217.722 v3(74.096,216.56)
  Layer 2 w0.15: U50.1@11.11,43.349 12.69,44.929 12.69,45.985 20.341,53.636 30.889,53.636 66.324,89.071 66.324,89.451 66.324,117.613 58.043,125.895 58.043,153.55 59.209,154.716 65.094,154.716 67.871,157.493 67.871,178.084 67.762,178.194 67.762,192.404 74.096,198.739 v3(74.096,216.56)
  Bottom Layer w0.15: U50.1@11.11,43.349 12.959,41.499 12.959,41.122 16.857,37.225 16.857,31.601 18.678,29.78 23.665,29.78 25.521,27.924 25.521,27.765 43.994,9.292 276.787,9.292 276.874,9.205 286.652,9.205 302.584,25.137 315.105,25.137 321.722,18.521 335.171,18.521 335.518,18.868 J18.G33@335.818,18.868 ; R24.2@71.04,214.518 72.055,214.518 v3(74.096,216.56)
Y1_CSP_SCL: J18.G31 R27.2 U8.6 U50.2 | length 523.1
  Top Layer w0.15: v3(72.16,189.9) 72.16,191.007 U8.6@72.22,191.068
  Layer 2 w0.15: U50.2@13.65,43.349 23.688,53.386 31.96,53.386 67.143,88.569 67.143,114.457 68.317,115.631 68.317,178.064 68.055,178.325 68.055,183.941 72.16,188.046 v3(72.16,189.9)
  Bottom Layer w0.15: U50.2@13.65,43.349 16.656,40.343 16.656,39.966 19.147,37.475 19.539,37.475 28.061,28.953 28.061,27.765 29.602,26.225 29.616,26.225 46.298,9.542 286.54,9.542 302.384,25.387 315.476,25.387 318.782,22.081 335.141,22.081 335.722,21.499 J18.G31@335.817,21.499 ; R27.2@71.257,189.648 71.872,189.648 v3@72.012,189.787
Y1_CSP_SDA: J18.G30 R26.2 U8.1 U50.3 | length 523.5
  Top Layer w0.15: U8.1@74.278,191.068 74.341,191.004 v3(74.341,189.88)
  Layer 2 w0.15: U50.3@16.19,43.349 25.978,53.136 32.642,53.136 67.443,87.937 67.443,114.333 68.65,115.54 68.65,163.548 73.207,168.104 73.207,180.295 71.179,182.323 71.179,185.389 74.341,188.551 v3(74.341,189.88)
  Bottom Layer w0.15: U50.3@16.19,43.349 18.039,41.499 18.039,41.122 24.375,34.787 24.375,33.992 48.5,9.866 286.51,9.866 302.281,25.637 315.849,25.637 319.156,22.331 335.171,22.331 335.62,22.78 J18.G30@335.734,22.78 ; R26.2@71.302,187.804 72.317,187.804 v3@74.358,189.846
pads on no net: C1.0 C2.0 C3.0 C4.0 C5.0 C6.0 C7.0 C8.0 C9.0 C10.0 C11.0 C12.0 C13.0 C14.0 C15.0 C16.0 C17.0 C18.0 C19.0 C20.0 C21.0 C22.0 C23.0 C24.0 C25.0 C26.0 C27.0 C28.0 C29.0 C30.0 C31.0 C32.0 C33.0 C34.0 C35.0 C36.0 C37.0 C38.0 C39.0 C40.0 C41.0 C42.0 C43.0 C44.0 C45.0 C46.0 C47.0 C48.0 C49.0 C50.0 C51.0 C52.0 C53.0 C54.0 C55.0 C56.0 C57.0 C58.0 C59.0 C60.0 C61.0 C62.0 C63.0 C64.0 C65.0 C66.0 C67.0 C68.0 C69.0 C70.0 C71.0 C72.0 C73.0 C74.0 C75.0 C76.0 C77.0 C78.0 C79.0 C80.0 C81.0 C84.0 C85.0 C86.0 C87.0 C88.0 C97.0 C98.0 C99.0 C100.0 C101.0 C103.0 C104.0 C105.0 C106.0 C110.0 C111.0 C112.0 C113.0 C114.0 C119.0 C120.0 C121.0 C123.0 C124.0 C125.0 C127.0 C128.0 C129.0 C130.0 C131.0 C132.0 C133.0 J1.2 J1.3 J1.4 J1.5 J2.2 J2.3 J2.4 J2.5 J3.2 J3.3 J3.4 J3.5 J4.2 J4.3 J4.4 J4.5 J5.2 J5.3 J5.4 J5.5 J6.2 J6.3 J6.4 J6.5 J7.2 J7.3 J7.4 J7.5 J8.2 J8.3 J8.4 J8.5 J9.2 J9.3 J9.4 J9.5 J10.2 J10.3 J10.4 J10.5 J11. J12. J13. J18. J18.C02 J18.C03 J18.C06 J18.C07 J18.C31 J18.C34 J18.C37 J18.D01 J18.D04 J18.D05 J18.D08 J18.D29 J18.D30 J18.D31 J18.D32 J18.D33 J18.D34 J18.D35 J18.D36 J18.D38 J18.D40 J18.G02 J18.G03 J18.G37 J18.H01 J18.H02 J18.H08 J18.H10 J18.H11 J18.H13 J18.H14 J18.H16 J18.H17 J18.H19 J18.H20 J18.H22 J18.H23 J18.H25 J18.H26 J18.H28 J18.H29 J18.H31 J18.H32 J18.H34 J18.H35 J18.H37 J18.H38 J18.H40 J21.3 J21.5 J22.3 J22.5 J23.3 J23.5 J24.3 J24.5 J25.3 J25.5 J28.3 J28.5 J29.3 J29.5 J30.3 J30.5 J31.3 J31.5 J32.3 J32.5 J33.3 J33.5 R1.0 R49.0 U37.1 U37.2@230.27,43.661 U37.2@230.271,43.662 U37.3@230.27,43.011 U37.3@230.271,43.012 U37.4@232.353,43.011 U37.4@232.354,43.012 U37.5@232.353,44.311 U37.5@232.354,44.312 U38.1 U38.2@248.046,43.571 U38.2@248.047,43.572 U38.3@248.046,42.921 U38.3@248.047,42.922 U38.4@250.13,42.922 U38.4@250.129,42.921 U38.5@250.13,44.222 U38.5@250.129,44.221 U39.1 U39.2@139.59,43.531 U39.2@139.589,43.53 U39.3@139.59,42.881 U39.3@139.589,42.88 U39.4@141.671,42.88 U39.4@141.672,42.881 U39.5@141.671,44.18 U39.5@141.672,44.181 U40.1 U40.2@148.544,43.597 U40.2@148.545,43.598 U40.3@148.544,42.947 U40.3@148.545,42.948 U40.4@150.627,42.947 U40.4@150.628,42.948 U40.5@150.627,44.247 U40.5@150.628,44.248 U41.1 U41.2@157.598,43.543 U41.2@157.599,43.544 U41.3@157.598,42.893 U41.3@157.599,42.894 U41.4@159.68,42.893 U41.4@159.681,42.894 U41.5@159.68,44.193 U41.5@159.681,44.194 U42.1 U42.2@166.657,43.592 U42.2@166.658,43.593 U42.3@166.657,42.942 U42.3@166.658,42.943 U42.4@168.74,42.942 U42.4@168.741,42.943 U42.5@168.74,44.242 U42.5@168.741,44.243 U43.1 U43.2@221.306,43.552 U43.2@221.307,43.553 U43.3@221.306,42.902 U43.3@221.307,42.903 U43.4@223.39,42.903 U43.4@223.389,42.902 U43.5@223.39,44.203 U43.5@223.389,44.202 U44.1 U44.2@194.361,43.632 U44.2@194.362,43.633 U44.3@194.361,42.982 U44.3@194.362,42.983 U44.4@196.443,42.982 U44.4@196.444,42.983 U44.5@196.443,44.282 U44.5@196.444,44.283 U45.1 U45.2@212.377,43.581 U45.2@212.378,43.582 U45.3@212.377,42.931 U45.3@212.378,42.932 U45.4@214.46,42.931 U45.4@214.461,42.932 U45.5@214.46,44.231 U45.5@214.461,44.232 U46.1 U46.2@176.027,43.592 U46.2@176.028,43.593 U46.3@176.027,42.942 U46.3@176.028,42.943 U46.4@178.11,42.943 U46.4@178.109,42.942 U46.5@178.11,44.243 U46.5@178.109,44.242 U47.1 U47.2@185.4,43.638 U47.2@185.399,43.637 U47.3@185.4,42.988 U47.3@185.399,42.987 U47.4@187.482,42.987 U47.4@187.483,42.988 U47.5@187.482,44.287 U47.5@187.483,44.288 U48.1 U48.2@239.117,43.6 U48.2@239.118,43.601 U48.3@239.117,42.95 U48.3@239.118,42.951 U48.4@241.2,42.95 U48.4@241.201,42.951 U48.5@241.2,44.25 U48.5@241.201,44.251 U49.1 U49.2@203.53,43.642 U49.2@203.531,43.643 U49.3@203.53,42.992 U49.3@203.531,42.993 U49.4@205.612,42.992 U49.4@205.614,42.993 U49.5@205.612,44.292 U49.5@205.614,44.293 U50.3.3V_1 U50.3.3V_2 U50.3.3V_3 U50.5V U50.31 U50.32 U50.D+ U50.D- U50.LED U50.ON/OFF U50.PROGRAM U50.R+ U50.R- U50.T+ U50.T- U50.USB_GND1 U50.USB_GND2 U50.VBAT U50.VIN U50.VUSB U51.3.3V_1 U51.3.3V_2 U51.3.3V_3 U51.5V U51.8 U51.9 U51.10 U51.11 U51.12 U51.13 U51.14 U51.15 U51.16 U51.17 U51.18 U51.19 U51.20 U51.21 U51.22 U51.23 U51.24 U51.25 U51.26 U51.27 U51.28 U51.29 U51.30 U51.31 U51.32 U51.33 U51.34 U51.35 U51.36 U51.37 U51.38 U51.39 U51.40 U51.41 U51.D+ U51.D- U51.LED U51.ON/OFF U51.PROGRAM U51.R+ U51.R- U51.T+ U51.T- U51.USB_GND1 U51.USB_GND2 U51.VBAT U51.VIN U51.VUSB U52.5 U52.6 U52.15 U52.16 U52.17 U54.5 U54.6 U54.15 U54.16 U54.17 U62.8 U63.8 U64.1@251.069,212.291 U64.2@251.069,211.021 U64.3@251.069,209.751 U64.4@251.069,208.481 U64.5@255.996,208.481 U64.6@255.996,209.751 U64.7@255.996,211.021 U64.8@255.996,212.291 U65.1@234.952,163.707 U65.2@234.952,162.437 U65.3@234.952,161.167 U65.4@234.952,159.897 U65.5@239.879,159.897 U65.6@239.879,161.167 U65.7@239.879,162.437 U65.8@239.879,163.707 U66.1 U66.2@137.235,110.616 U66.2@137.236,110.617 U66.3@137.235,109.966 U66.3@137.236,109.967 U66.4@139.317,109.966 U66.4@139.318,109.967 U66.5@139.317,111.266 U66.5@139.318,111.267 U67.8 U68.1@301.044,176.491 U68.2@299.774,176.491 U68.3@298.504,176.491 U68.4@297.234,176.491 U68.5@297.234,171.563 U68.6@298.504,171.563 U68.7@299.774,171.563 U68.8@301.044,171.563 U69.5 U69.6 U69.15 U69.16 U69.17 VDD_1.0
copper on no net: | length 0.6
  Layer 1 w0.15: 55.853,221.615 56.303,222.066

## Polygon pours and split planes (outlines as drawn)
GND on Top Layer "GND_L01_P332" (solid, remove dead copper, pour order 332): 48.153,251.72 48.176,251.698 347.629,251.698 347.629,162.52 297.683,162.52 297.818,187.604 298.99,188.776 312.664,188.776 312.664,188.978 328.038,204.352 328.038,209.751 327.752,209.751 323.599,213.903 319.411,213.903 310.462,204.955 310.462,200.015 307.098,196.65 306.381,197.366 297.182,197.366 297.182,208.57 297.683,209.071 297.683,209.715 293.173,214.225 288.649,214.225 274.068,199.644 274.068,189.177 250.741,165.851 250.741,160.767 250.443,160.767 247.003,157.328 224.574,157.328 222.481,159.421 222.481,172.281 225.92,175.72 250.742,175.72 264.498,189.476 264.498,205.774 263.9,205.774 262.405,207.27 249.545,207.27 241.022,198.747 233.097,198.747 226.219,205.625 212.462,205.625 207.079,200.242 206.182,201.139 202.594,201.139 202.594,226.612 199.789,229.416 199.598,229.225 48.16,229.225 48.16,251.698
GND on Top Layer "GND_L01_P335" (solid, remove dead copper, pour order 335): 0.884,0.678 347.197,0.678 348.943,2.424 348.943,78.749 348.748,78.69 348.367,78.69 348.367,163.139 280.322,163.139 256.144,138.962 256.144,84.127 250.707,78.69 180.544,78.69 178.169,76.314 136.175,76.314 136.175,117.639 136.175,153.882 132.369,157.688 123.426,157.688 97.743,132.005 97.743,119.706 57.74,119.706 51.296,119.706 48.343,122.659 48.343,251.714 0.307,251.709 0.307,78.025 0.884,78.025
GND on Top Layer "Top Layer-GND" (solid, pour order 346): 126.38,144.212 126.413,144.214 126.478,144.201 126.545,144.197 126.623,144.182 126.686,144.16 126.751,144.147 126.81,144.118 126.873,144.097 126.928,144.06 126.988,144.03 127.054,143.986 127.104,143.942 127.159,143.905 127.203,143.855 127.253,143.812 127.29,143.756 127.334,143.706 127.378,143.64 127.408,143.581 127.444,143.525 127.466,143.462 127.495,143.403 127.508,143.338 127.529,143.275 127.545,143.197 127.549,143.13 127.562,143.065 127.558,142.999 127.562,142.933 127.549,142.867 127.545,142.801 127.529,142.723 127.508,142.66 127.495,142.595 127.466,142.535 127.444,142.473 127.44,142.466 127.44,142.34 127.449,142.318 127.484,142.055 127.484,140.905 127.449,140.643 127.348,140.399 127.187,140.189 126.977,140.028 126.732,139.926 126.47,139.892 126.22,139.892 125.958,139.926 125.713,140.028 125.503,140.189 125.342,140.399 125.241,140.643 125.206,140.905 125.206,142.055 125.241,142.318 125.25,142.34 125.25,142.471 125.249,142.473 125.228,142.535 125.198,142.595 125.186,142.66 125.164,142.723 125.149,142.801 125.144,142.867 125.131,142.933 125.136,142.999 125.131,143.065 125.144,143.13 125.149,143.197 125.164,143.275 125.186,143.338 125.198,143.403 125.228,143.462 125.249,143.525 125.286,143.581 125.316,143.64 125.36,143.706 125.404,143.756 125.44,143.812 125.49,143.855 125.534,143.905 125.589,143.942 125.639,143.986 125.706,144.03 125.765,144.06 125.82,144.097 125.883,144.118 125.943,144.147 126.008,144.16 126.071,144.182 126.149,144.197 126.215,144.201 126.281,144.214 126.314,144.212 126.347,144.217
VCM on Top Layer "VCM_L01_P315" (solid, pour order 316): 60.434,228.329 198.645,228.341 198.645,198.219 215.573,181.291 215.573,130.994 219.674,126.893 241.442,126.893 241.442,90.778 235.683,85.02 172.491,85.02 172.491,87.198 136.978,122.712 136.978,154.42 132.69,158.708 123.017,158.708 96.991,132.682 96.991,121.314 56.605,121.314 54.05,123.868 54.05,224.765 55.764,224.765 59.341,228.341 60.422,228.341
VCM on Bottom Layer "VCM_L04_P316" (solid, pour order 317): 60.471,228.328 198.682,228.34 198.682,198.218 215.61,181.29 215.61,130.993 219.711,126.892 241.478,126.892 241.478,90.777 235.72,85.018 172.528,85.018 172.528,87.197 137.014,122.71 137.014,154.419 132.727,158.707 123.054,158.707 97.027,132.68 97.027,121.312 56.641,121.312 54.087,123.867 54.087,224.763 55.801,224.763 59.377,228.34 60.459,228.34
GND on Bottom Layer "GND_L04_P326" (solid, remove dead copper, pour order 326): 0.884,0.678 347.197,0.678 348.943,2.424 348.943,78.749 348.748,78.69 348.367,78.69 348.367,163.139 280.322,163.139 256.144,138.962 256.144,84.127 250.707,78.69 180.544,78.69 178.169,76.314 135.449,76.314 135.449,78.69 134.872,78.69 134.872,116.336 136.175,117.639 136.175,153.882 132.369,157.688 123.426,157.688 97.743,132.005 97.743,119.706 57.74,119.706 51.296,119.706 48.343,122.659 48.343,251.714 0.307,251.709 0.307,78.025 0.884,78.025
GND on Bottom Layer "GND_L04_P334" (solid, remove dead copper, pour order 334): 48.153,251.72 48.176,251.698 347.629,251.698 347.629,162.52 297.683,162.52 297.818,187.604 298.99,188.776 312.664,188.776 312.664,188.978 328.038,204.352 328.038,209.751 327.752,209.751 323.599,213.903 319.411,213.903 310.462,204.955 310.462,200.015 307.098,196.65 306.381,197.366 297.182,197.366 297.182,208.57 297.683,209.071 297.683,209.715 293.173,214.225 288.649,214.225 274.068,199.644 274.068,189.177 250.741,165.851 250.741,160.767 250.443,160.767 247.003,157.328 224.574,157.328 222.481,159.421 222.481,172.281 225.92,175.72 250.742,175.72 264.498,189.476 264.498,205.774 263.9,205.774 262.405,207.27 249.545,207.27 241.022,198.747 233.097,198.747 226.219,205.625 212.462,205.625 207.079,200.242 206.182,201.139 202.594,201.139 202.594,226.612 199.789,229.416 199.598,229.225 48.16,229.225 48.16,251.698
PCB_DGND on Bottom Layer "PCB_DGND_L04_P314" (solid, remove dead copper, pour order 314): 0.324,1.375 0.324,48.836 33.918,48.836 34.156,48.935 34.632,49.411 34.735,49.66 34.735,83.294 134.89,83.294 134.89,80.918 177.61,80.918 179.985,83.294 348.189,83.294 348.384,83.353 348.384,7.028 342.731,1.375
GND on Layer 1 "Layer 1-GND" (solid, pour order 344): 333 vertices, not listed, extent 78.258,101.256 127.562,152.173
VCM on Layer 1 "VCM_L02_P314" (solid, pour order 315): 60.468,228.33 198.679,228.342 198.679,198.22 215.607,181.292 215.607,130.995 219.708,126.894 241.475,126.894 241.475,90.779 235.717,85.021 172.525,85.021 172.525,87.199 137.012,122.713 137.012,154.421 132.724,158.709 123.051,158.709 97.024,132.683 97.024,121.315 56.638,121.315 54.084,123.869 54.084,224.766 55.798,224.766 59.374,228.342 60.456,228.342
VCM on Layer 2 "VCM_L03_P317" (solid, pour order 324): 60.508,228.297 198.719,228.309 198.719,198.187 215.647,181.259 215.647,130.962 219.748,126.861 241.515,126.861 241.515,90.746 235.757,84.987 172.565,84.987 172.565,87.166 137.052,122.679 137.052,154.388 132.764,158.676 123.091,158.676 97.064,132.649 97.064,121.281 56.678,121.281 54.124,123.836 54.124,224.732 55.838,224.732 59.415,228.309 60.496,228.309